# Altium PCB arduino_shield.PcbDoc
Units mil, origin at the board's own origin, x right, y up, seen from the top; angles counter-clockwise.
Board outline 2250 x 2100 mil, 4 copper layers (Top Layer, GND, 5V, Bottom Layer); 4 components, 26 nets, 32 pads, 0 vias.
Unrouted connection lines stored in the file: 3.
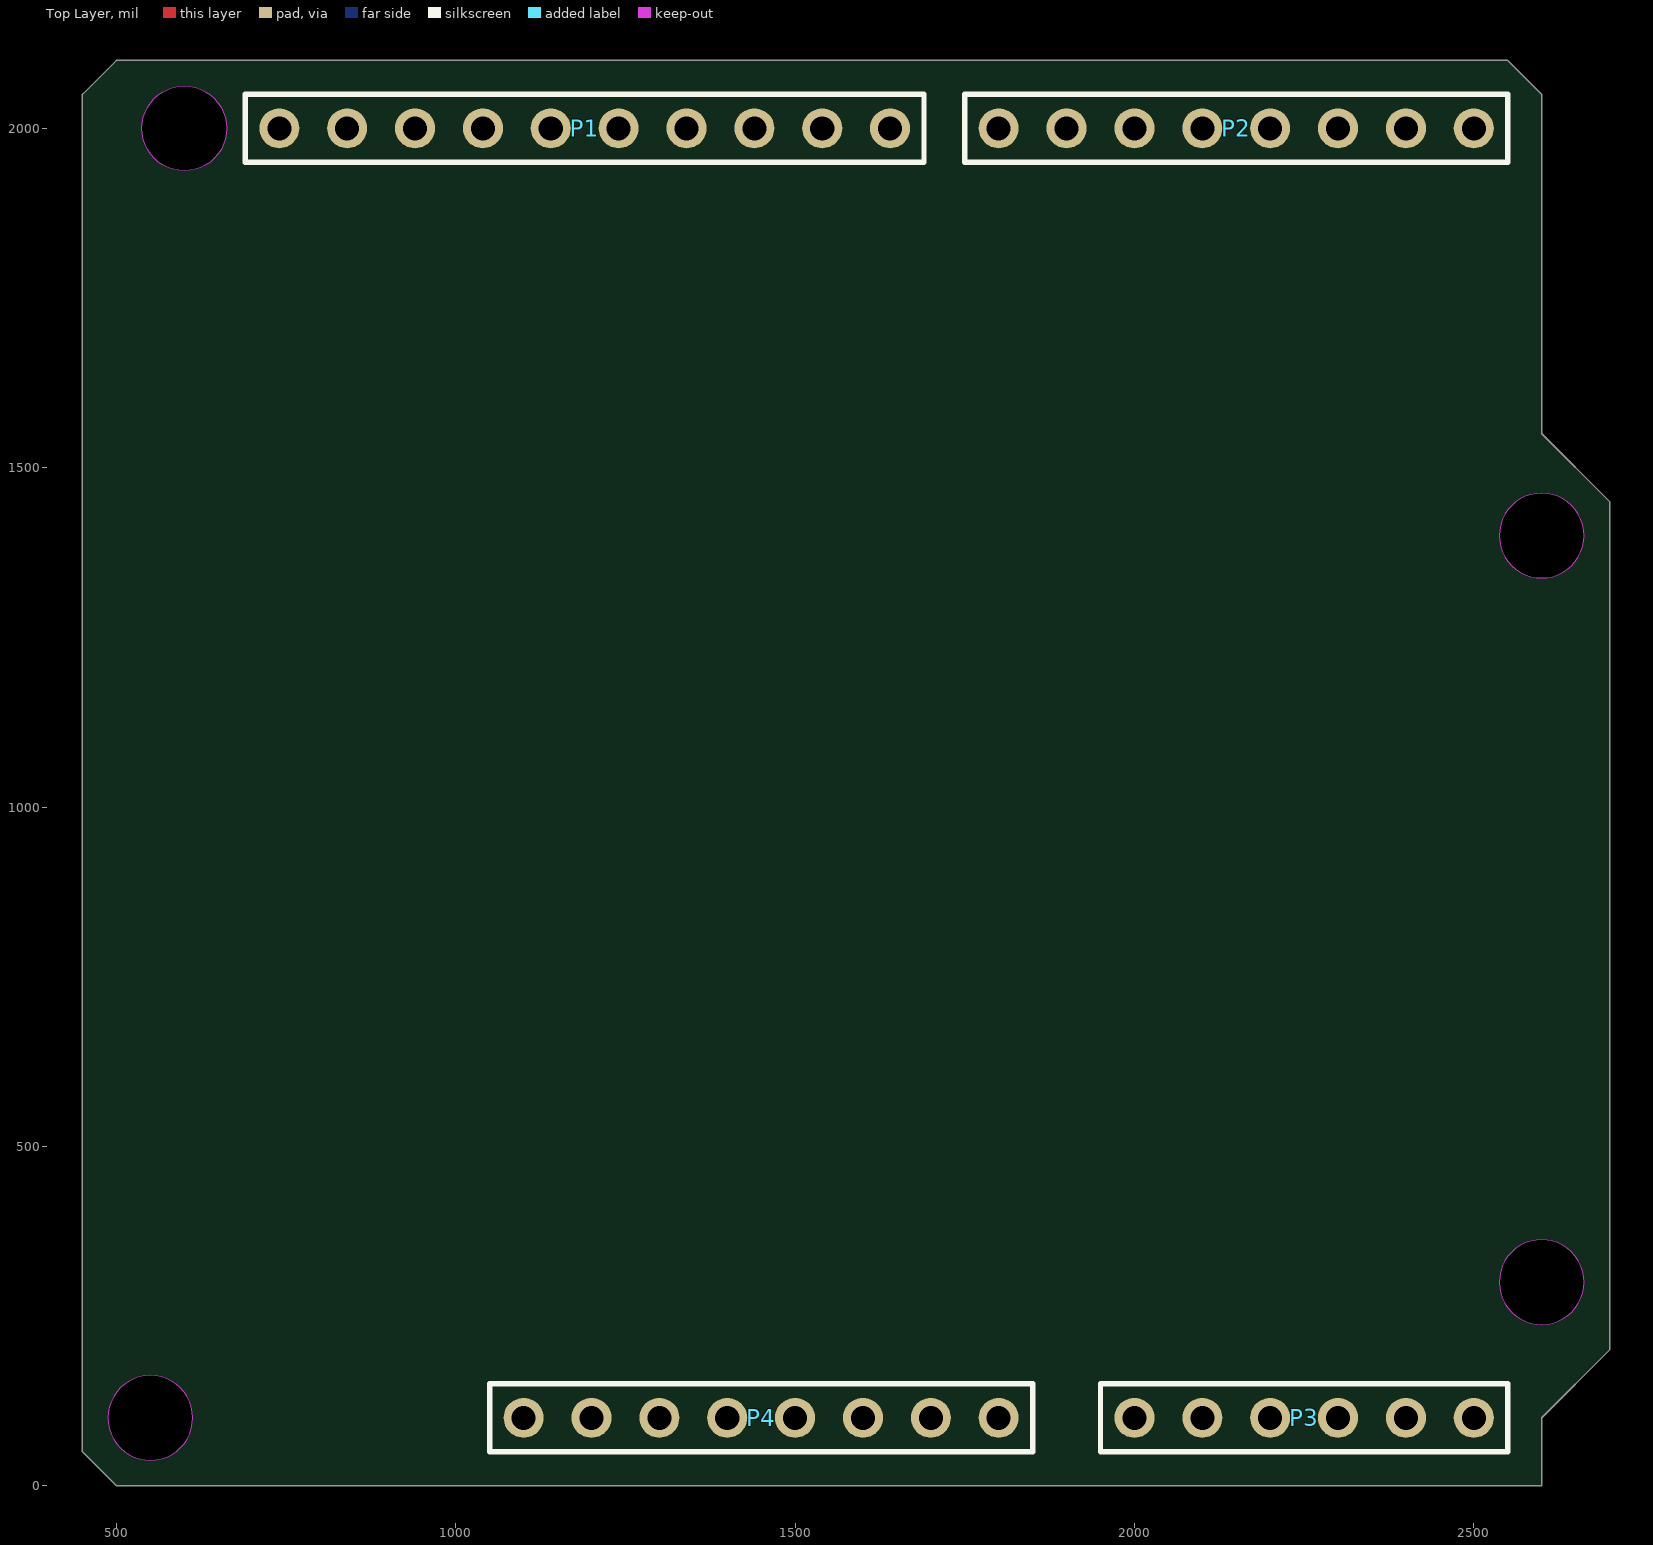
[diagram p0: Top Layer view]
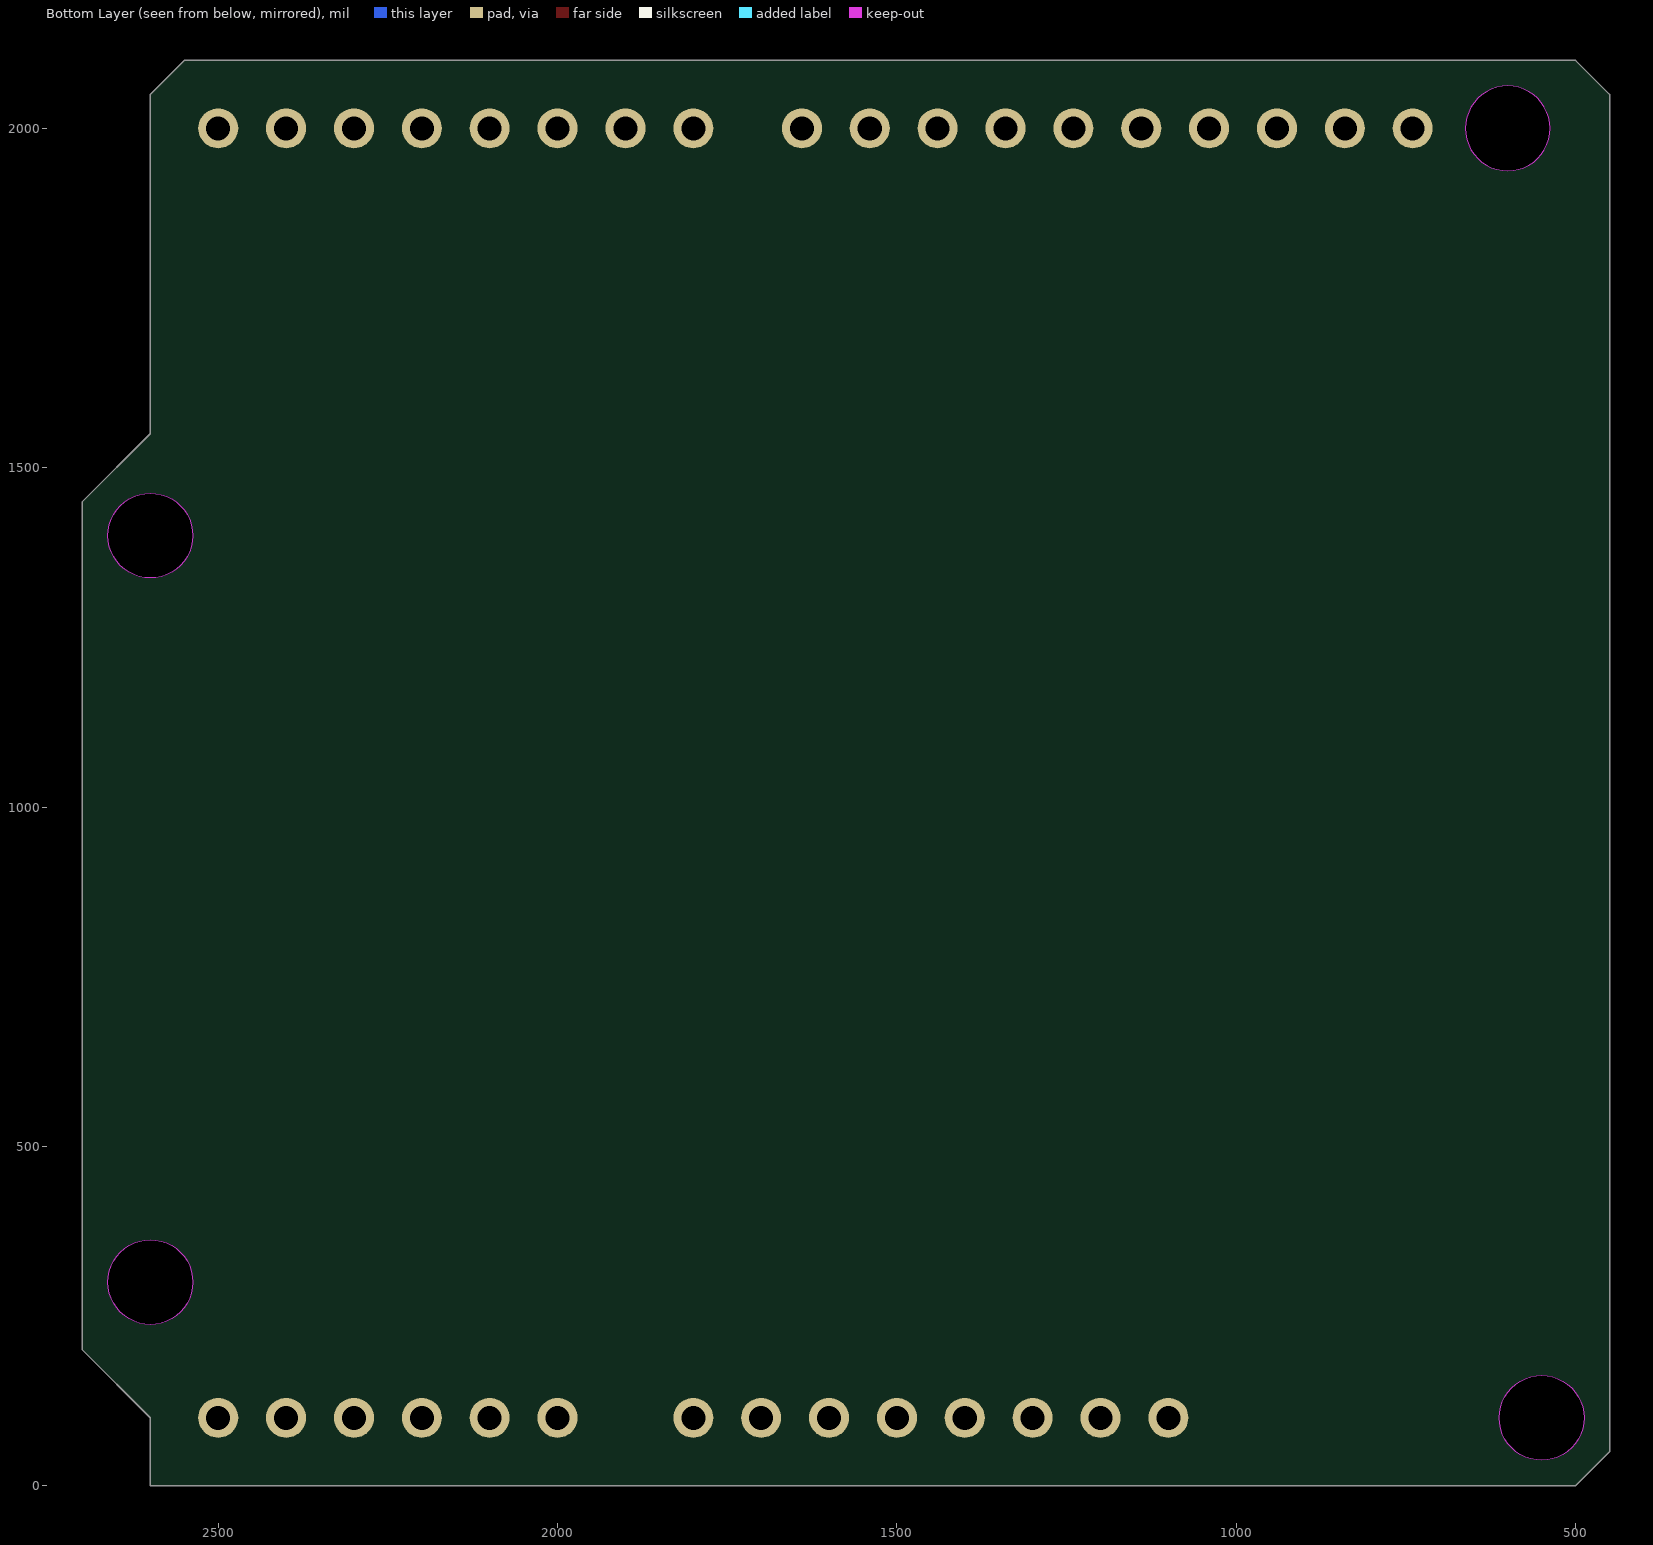
[diagram p1: Bottom Layer view, seen from below]
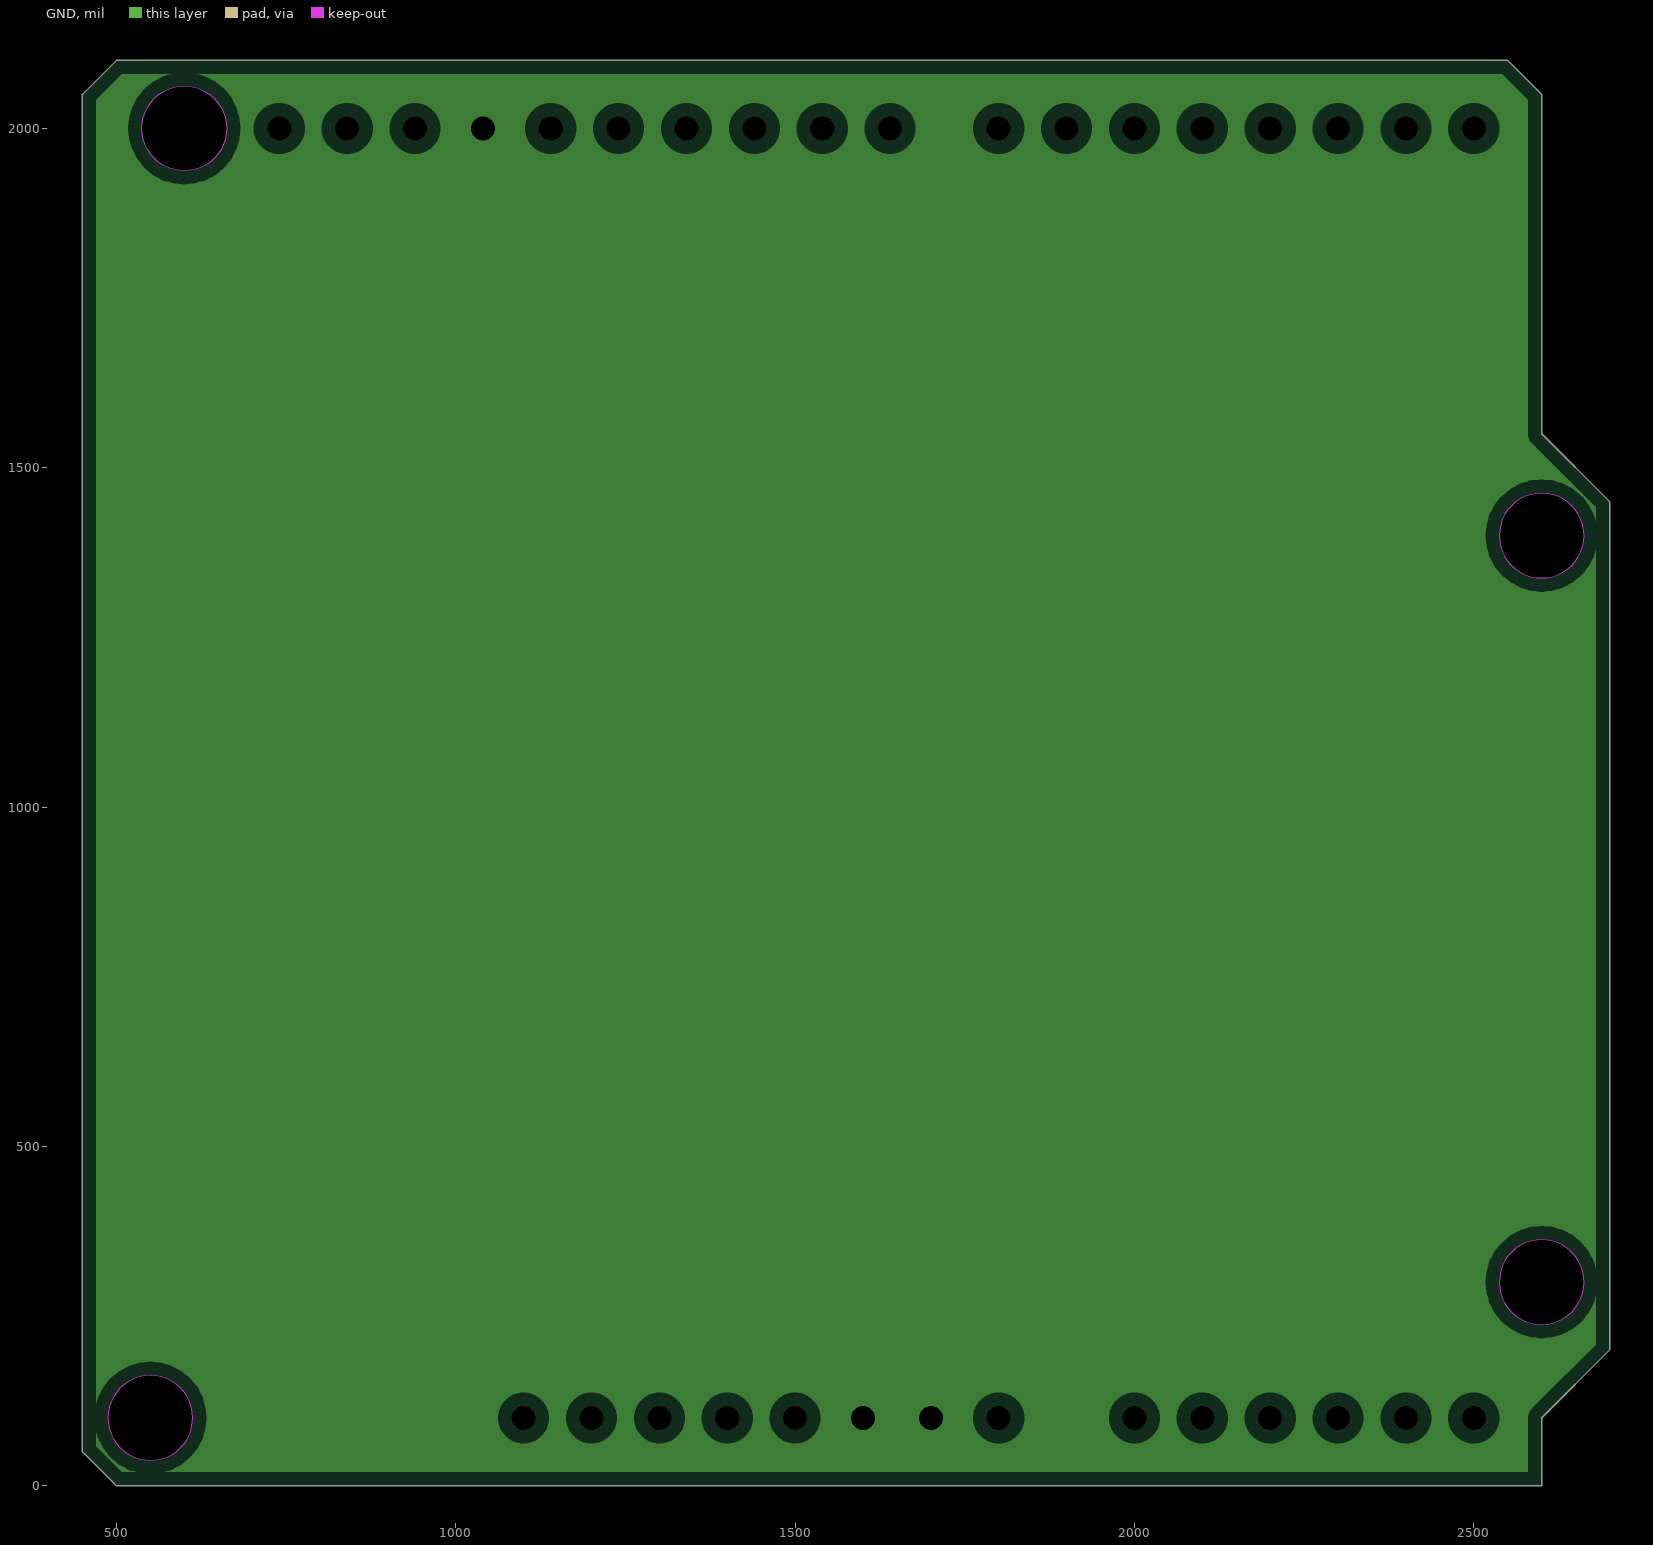
[diagram p2: GND, clearances drawn from the general rule]
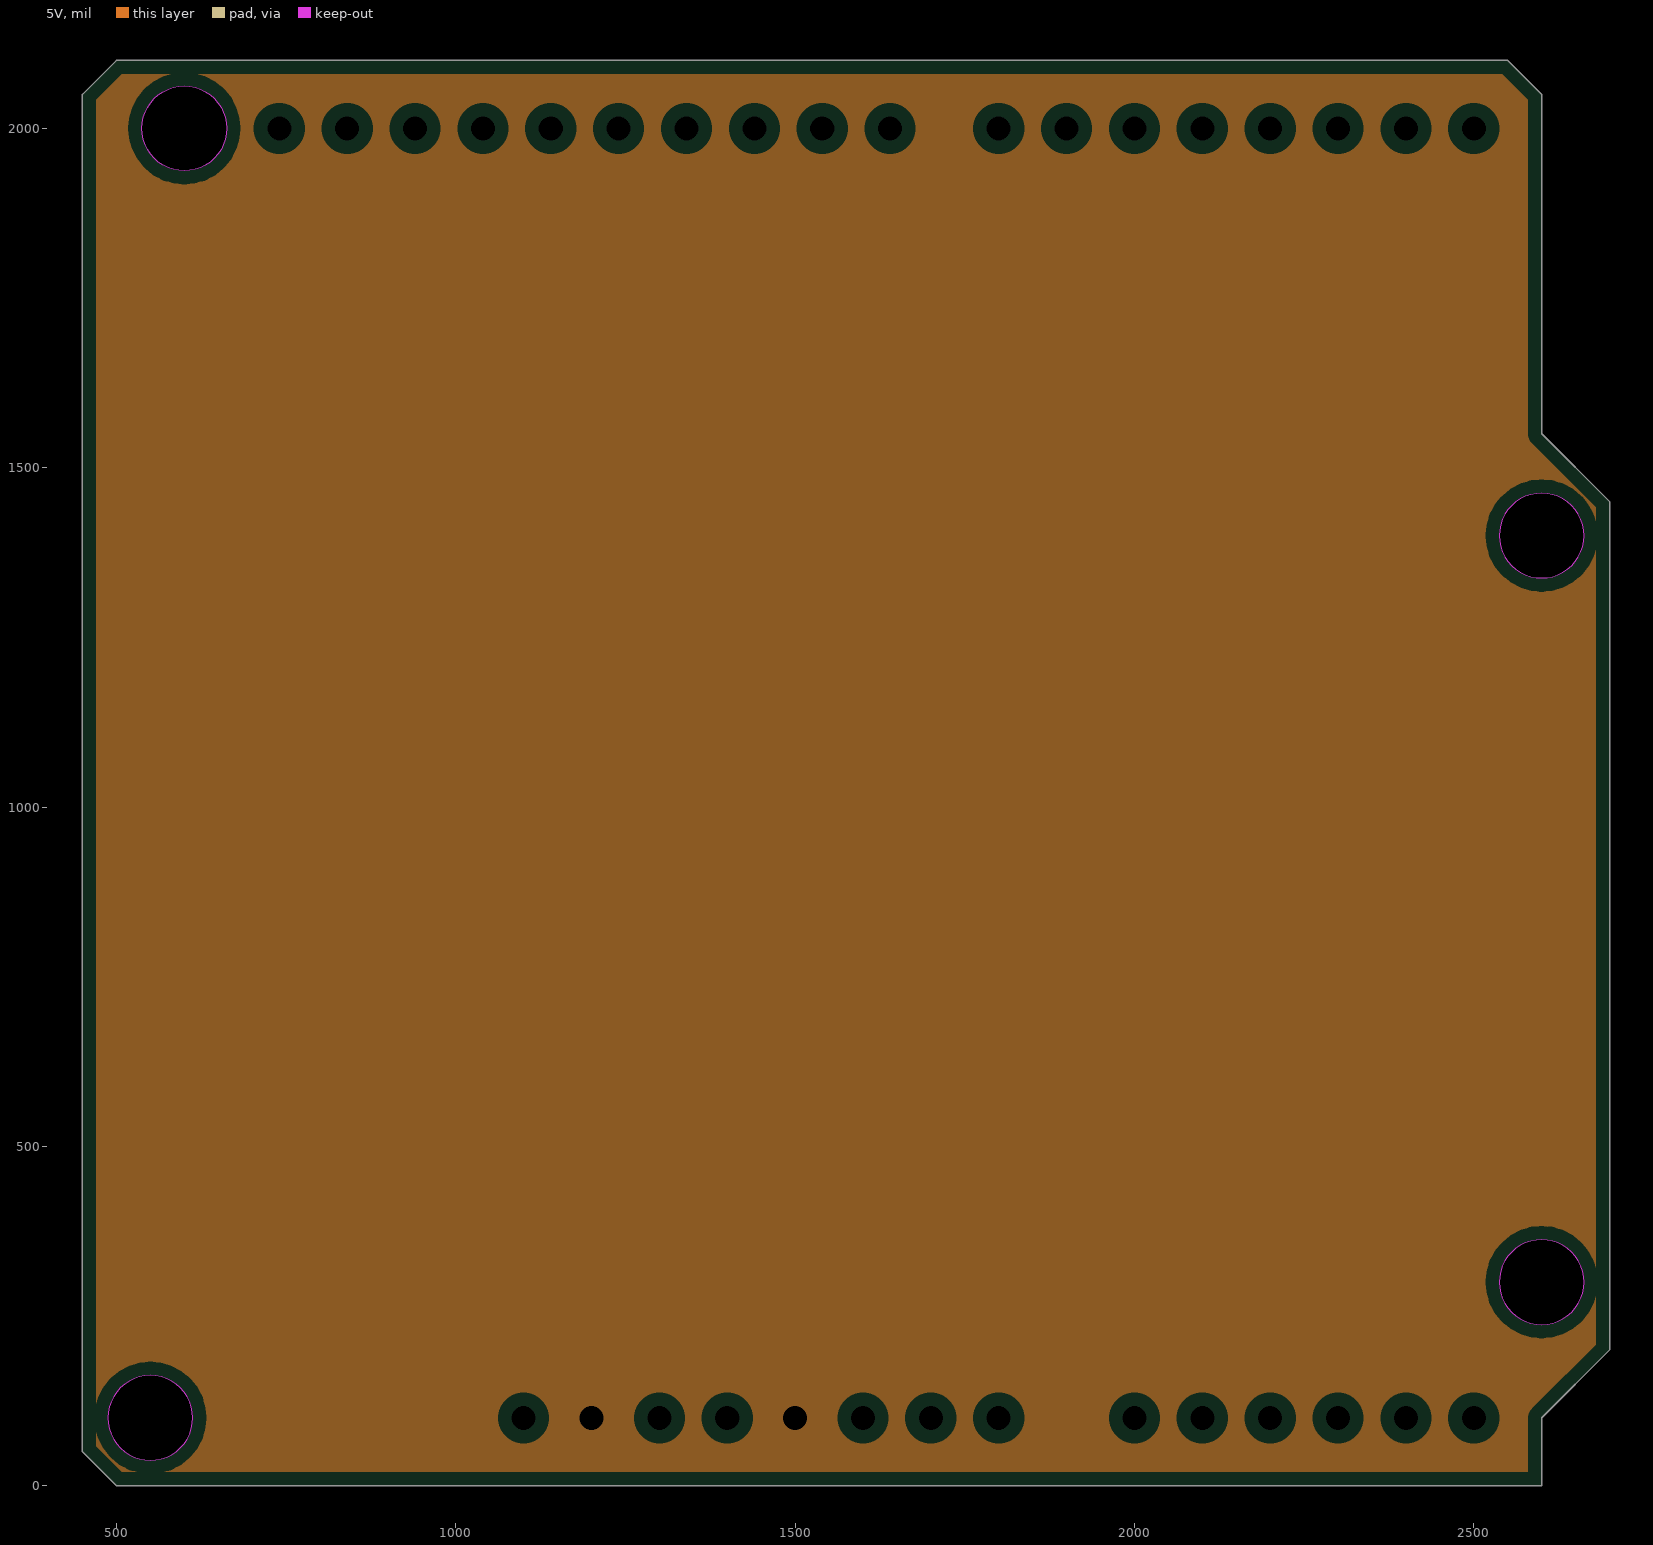
[diagram p3: 5V, clearances drawn from the general rule]

## Layer stack, top to bottom
Top Solder: solder mask 0.4, Solder Resist, Dk 3.5
Top Layer: signal copper 1.4
Dielectric 1: dielectric 12.6, FR-4, Dk 4.8
GND: plane copper 1.4, net GND
Dielectric2: dielectric 12.6, FR-4, Dk 4.8
5V: plane copper 1.4, net +5V
Dielectric3: dielectric 12.6, FR-4, Dk 4.8
Bottom Layer: signal copper 1.4
Bottom Solder: solder mask 0.4, Solder Resist, Dk 3.5

## Board outline
500,0 2600,0 2600,100 2700,200 2700,1450 2600,1550 2600,2050 2550,2100 500,2100 450,2050 450,1080 450,50
cut-out: 487.5,100 ccw(c550,100) 550,37.5 ccw(c550,100) 612.5,100 ccw(c550,100) 550,162.5 ccw(c550,100)
cut-out: 600,1937.5 cw(c600,2000) 537.5,2000 cw(c600,2000) 600,2062.5 cw(c600,2000) 662.5,2000 cw(c600,2000)
cut-out: 2537.5,1400 ccw(c2600,1400) 2600,1337.5 ccw(c2600,1400) 2662.5,1400 ccw(c2600,1400) 2600,1462.5 ccw(c2600,1400)
cut-out: 2537.5,300 ccw(c2600,300) 2600,237.5 ccw(c2600,300) 2662.5,300 ccw(c2600,300) 2600,362.5 ccw(c2600,300)

## Design rules (kind name [scope] priority, off if disabled: settings)
Clearance [All] p1: gap=10
PlaneClearance [All] p1: clearance=20
PlaneConnect [All] p1: planeconnectstyle=Relief reliefexpansion=20 reliefentries=4 reliefconductorwidth=10 reliefairgap=10
PolygonConnect [All] p1: connectstyle=Relief reliefconductorwidth=10 reliefentries=4 polygonreliefangle="90 Angle" airgapwidth=10
RoutingVias [All] p1: holewidth=28 width=50 viastyle="Through Hole" minholewidth=28 minwidth=50 maxholewidth=28 maxwidth=50
SolderMaskExpansion [All] p1: expansion=4
UnpouredPolygon [All] p1: allowunpoured=FALSE
Width [All] p1: maxlimit=10 minlimit=10 preferedwidth=10
27 further rules are at their usual default settings.

## Components (designator, comment, footprint, x,y, rotation, side; value= is the part's Value field where it differs from the comment)
P1 "Header 10" HDR1X10 1640,2000 r180 top
P2 "Header 8" HDR1X8 2500,2000 r180 top
P3 "Header 6" HDR1X6 2000,100 r0 top
P4 "Header 8" HDR1X8 1100,100 r0 top

## Footprints (in the part's own frame and the unit in brackets; to place one, negate y for a bottom-side part, rotate by r counter-clockwise, add the part's x,y. Pads: shape width x height; smd on the part's side, far side on the other; paste and mask are expansions set on the pad)
HDR1X6 [mm] "Connector; Header; 6 Position"
  round 1.5 hole 0.9: 1(0,0) 2(2.54,0) 3(5.08,0) 4(7.62,0) 5(10.16,0) 6(12.7,0)
  silkscreen extent -1.27,-1.27 13.97,1.27
HDR1X8 [mm] "Connector; Header; 8 Position"
  round 1.5 hole 0.9: 1(0,0) 2(2.54,0) 3(5.08,0) 4(7.62,0) 5(10.16,0) 6(12.7,0) 7(15.24,0) 8(17.78,0)
  silkscreen extent -1.27,-1.27 19.05,1.27
HDR1X10 [mm] "Connector; Header; 10 Position"
  round 1.5 hole 0.9: 1(0,0) 2(2.54,0) 3(5.08,0) 4(7.62,0) 5(10.16,0) 6(12.7,0) 7(15.24,0) 8(17.78,0) 9(20.32,0) 10(22.86,0)
  silkscreen extent -1.27,-1.27 24.13,1.27

## Part data
P1: "Header, 10-Pin"
P2 P4: "Header, 8-Pin"
P3: "Header, 6-Pin"

## Nets (pads, with @x,y where several pads share a name; then routed paths per layer and width w, separated by ;. In a path a pad name is that pad's centre, name@x,y a point inside that pad or via, vN(x,y) a via of type N, cw(c..) or ccw(c..) an arc to the next point about the centre after c; other vN are vias at no path point)
+3V3: P4.4
+5V: P4.2 P4.5
AD0: P3.1
AD1: P3.2
AD2: P3.3
AD3: P3.4
AD4/SDA: P1.9 P3.5
AD5/SCL: P1.10 P3.6
AREF: P1.8
GND: P1.7 P4.6 P4.7
IO2: P2.3
IO3: P2.4
IO4: P2.5
IO5: P2.6
IO6: P2.7
IO7: P2.8
IO8: P1.1
IO9: P1.2
MISO/IO12: P1.5
MOSI/IO11: P1.4
RESET: P4.3
RX/IO0: P2.1
SCK/IO13: P1.6
SS/IO10: P1.3
TX/IO1: P2.2
VIN: P4.8
pads on no net: P4.1

## Polygon pours and split planes (outlines as drawn)
GND on GND (split plane): 472.75,70.13 473.63,68 474.25,66.49 480.06,55.64 480.93,54.32 482.25,52.36 490.06,42.84 492.84,40.06 502.36,32.25 503.45,31.52 505.64,30.06 516.49,24.25 520.13,22.75 528.87,20.1 508.32,20.1 470.1,58.32 470.1,78.87
GND on GND (split plane): 318 vertices, not listed, extent 470.1,20.1 2679.9,2079.9
+5V on 5V (split plane): 472.75,70.13 473.63,68 474.25,66.49 480.06,55.64 480.93,54.32 482.25,52.36 490.06,42.84 492.84,40.06 502.36,32.25 503.45,31.52 505.64,30.06 516.49,24.25 520.13,22.75 528.87,20.1 508.32,20.1 470.1,58.32 470.1,78.87
+5V on 5V (split plane): 318 vertices, not listed, extent 470.1,20.1 2679.9,2079.9

## Other copper
Top Layer:
  text "Top Layer" at 2950,1435 h60
Bottom Layer:
  text "Bottom Layer" at 2950,1314.17 h60
GND (plane layer: these items are gaps in the copper):
  text "GND Plane" at 2950,1173.34 h60
5V (plane layer: these items are gaps in the copper):
  text "5V Plane" at 2950,1052.5 h60

## Silkscreen, mask and mechanical layers (free items; w line width, h text height)
Top Overlay:
  text "Top Overlay" at 2950,951.66 h60
Bottom Overlay:
  text "Bottom Overlay" at 2945,561.66 h60
Top Solder:
  text "Top Solder" at 2950,830.83 h60
Bottom Solder:
  text "Bottom Solder" at 2950,690 h60
Mechanical 1:
  lines w5: 450,50 500,0 2600,0 2600,100 2700,200 2700,1450 2600,1550 2600,2050 2550,2100 500,2100 450,2050 450,50

## Dimensions
2600,0 to 2550,2100 on Mechanical 1
450,50 to 2700,200 on Mechanical 1